# EAGLE board LTC_Balancer1 (EAGLE 5.06)

Size 160 x 100 mm. Coordinates in mm from the lower left corner, seen from the top.
Outline: 0,0 160,0 160,100 0,100 0,0
Copper layers (1*16): Top 0.035mm / dielectric 1.5mm / Bottom 0.035mm
Design rules "default": minimum track width 10mil, minimum drill 24mil, track to track 8mil, track to pad 8mil, pad to pad 8mil, via to via 8mil, smd to smd 8mil, copper to edge 40mil, drill to drill 8mil, minimum pad ring 10mil, minimum via ring 8mil, stop-mask expansion 4mil, vias tented up to drill 0mil, thermal gap 10mil

## Footprints (pad centres in the part's own frame; a part is rotated, then mirrored left to right if it is on the bottom)
2X04 = drill 1.016 octagon: 1 -3.81,-1.27; 2 -3.81,1.27; 3 -1.27,-1.27; 4 -1.27,1.27; 5 1.27,-1.27; 6 1.27,1.27; 7 3.81,-1.27; 8 3.81,1.27
1X04 = drill 1.016 long: 1 -3.81,0; 2 -1.27,0; 3 1.27,0; 4 3.81,0
1X12 = drill 1.016 long: 1 -13.97,0; 2 -11.43,0; 3 -8.89,0; 4 -6.35,0; 5 -3.81,0; 6 -1.27,0; 7 1.27,0; 8 3.81,0; 9 6.35,0; 10 8.89,0; 11 11.43,0; 12 13.97,0
C1206 = smd 1.6 x 1.8: 1 -1.4,0; 2 1.4,0
1X01 = drill 1.016 octagon: 1 0,0
DIL16 = drill 0.813 offset: 1 -8.89,-3.81; 2 -6.35,-3.81; 3 -3.81,-3.81; 4 -1.27,-3.81; 5 1.27,-3.81; 6 3.81,-3.81; 7 6.35,-3.81; 8 8.89,-3.81; 9 8.89,3.81; 10 6.35,3.81; 11 3.81,3.81; 12 1.27,3.81; 13 -1.27,3.81; 14 -3.81,3.81; 15 -6.35,3.81; 16 -8.89,3.81
R1206 = smd 1.6 x 1.803: 1 -1.422,0; 2 1.422,0
R_5W = drill 0.813 octagon: 1 0.46,0; 2 28.08,0
ML10 = drill 0.914 octagon: 1 -5.08,-1.27; 2 -5.08,1.27; 3 -2.54,-1.27; 4 -2.54,1.27; 5 0,-1.27; 6 0,1.27; 7 2.54,-1.27; 8 2.54,1.27; 9 5.08,-1.27; 10 5.08,1.27
SO8 = smd 1.524 x 0.61: 1 1.067,4.445; 2 1.067,3.175; 3 1.067,1.905; 4 1.067,0.635; 5 6.553,0.635; 6 6.553,1.905; 7 6.553,3.175; 8 6.553,4.445
1X03 = drill 1.016 long: 1 -2.54,0; 2 0,0; 3 2.54,0
SSOP48 = smd 0.3 x 1.25: P$1 0,0.5; P$2 0.5,0.5; P$3 1,0.5; P$4 1.5,0.5; P$5 2,0.5; P$6 2.5,0.5; P$7 3,0.5; P$8 3.5,0.5; P$9 4,0.5; P$10 4.5,0.5; P$11 5,0.5; P$12 5.5,0.5; P$13 6,0.5; P$14 6.5,0.5; P$15 7,0.5; P$16 7.5,0.5; P$17 8,0.5; P$18 8.5,0.5; P$19 9,0.5; P$20 9.5,0.5; P$21 10,0.5; P$22 10.5,0.5; P$23 10.5,7.5; P$24 10,7.5; P$25 9.5,7.5; P$26 9,7.5; P$27 8.5,7.5; P$28 8,7.5; P$29 7.5,7.5; P$30 7,7.5; P$31 6.5,7.5; P$32 6,7.5; P$33 5.5,7.5; P$34 5,7.5; P$35 4.5,7.5; P$36 4,7.5; P$37 3.5,7.5; P$38 3,7.5; P$39 2.5,7.5; P$40 2,7.5; P$41 1.5,7.5; P$42 1,7.5; P$43 0.5,7.5; P$44 0,7.5

## Placement (x,y rotation side)
A_SEL  [2X04]  -63.5,-377.19 0 top  (outside the outline)
A_SEL2  [1X04]  -63.5,-384.81 0 top  (outside the outline)
BAT_CON  [1X12]  -53.34,-266.7 0 top  (outside the outline)
C_REF  1u  [C1206]  -66.04,-350.52 0 top  (outside the outline)
C_REG  1u  [C1206]  -66.04,-355.6 0 top  (outside the outline)
CF1  100n  [C1206]  -57.15,-391.16 0 top  (outside the outline)
CF2  100n  [C1206]  -57.15,-407.67 0 top  (outside the outline)
CF3  100n  [C1206]  -66.04,-454.66 0 top  (outside the outline)
CF4  100n  [C1206]  -66.04,-461.01 0 top  (outside the outline)
CF5  100n  [C1206]  -66.04,-467.36 0 top  (outside the outline)
CF6  100n  [C1206]  -66.04,-473.71 0 top  (outside the outline)
CF7  100n  [C1206]  -66.04,-480.06 0 top  (outside the outline)
CF8  100n  [C1206]  -66.04,-486.41 0 top  (outside the outline)
CF9  100n  [C1206]  -66.04,-492.76 0 top  (outside the outline)
CF10  100n  [C1206]  -66.04,-499.11 0 top  (outside the outline)
CF11  100n  [C1206]  -66.04,-505.46 0 top  (outside the outline)
CF12  100n  [C1206]  -66.04,-511.81 0 top  (outside the outline)
JP1  [1X01]  -67.31,-402.59 0 top  (outside the outline)
OK1  ILQ1  [DIL16]  -57.15,-276.86 0 top  (outside the outline)
R2  1k8  [R1206]  -66.04,-288.29 0 top  (outside the outline)
R3  910  [R1206]  -66.04,-294.64 0 top  (outside the outline)
R4  910  [R1206]  -66.04,-300.99 0 top  (outside the outline)
R5  910  [R1206]  -66.04,-307.34 0 top  (outside the outline)
R6  910  [R1206]  -66.04,-313.69 0 top  (outside the outline)
R7  1k8  [R1206]  -66.04,-320.04 0 top  (outside the outline)
R8  1k8  [R1206]  -66.04,-326.39 0 top  (outside the outline)
R9  1k8  [R1206]  -66.04,-332.74 0 top  (outside the outline)
RF1  100  [R1206]  -57.15,-396.24 0 top  (outside the outline)
RF2  100  [R1206]  -57.15,-412.75 0 top  (outside the outline)
RF3  100  [R1206]  -66.04,-518.16 0 top  (outside the outline)
RF4  100  [R1206]  -66.04,-524.51 0 top  (outside the outline)
RF5  100  [R1206]  -66.04,-530.86 0 top  (outside the outline)
RF6  100  [R1206]  -66.04,-537.21 0 top  (outside the outline)
RF7  100  [R1206]  -66.04,-543.56 0 top  (outside the outline)
RF8  100  [R1206]  -66.04,-549.91 0 top  (outside the outline)
RF9  100  [R1206]  -66.04,-556.26 0 top  (outside the outline)
RF10  100  [R1206]  -66.04,-562.61 0 top  (outside the outline)
RF11  100  [R1206]  -66.04,-568.96 0 top  (outside the outline)
RF12  100  [R1206]  -66.04,-575.31 0 top  (outside the outline)
RL1  R_5W  [R_5W]  39.37,25.4 0 top
RL2  R_5W  [R_5W]  13.97,36.83 0 top
RL3  R_5W  [R_5W]  -36.83,-435.61 0 top  (outside the outline)
RL4  R_5W  [R_5W]  -36.83,-422.91 0 top  (outside the outline)
RL6  R_5W  [R_5W]  -36.83,104.14 0 top  (outside the outline)
RL7  R_5W  [R_5W]  -36.83,158.75 0 top  (outside the outline)
RL8  R_5W  [R_5W]  -36.83,146.05 0 top  (outside the outline)
RL9  R_5W  [R_5W]  -36.83,200.66 0 top  (outside the outline)
RL10  R_5W  [R_5W]  -36.83,187.96 0 top  (outside the outline)
RL11  R_5W  [R_5W]  -36.83,242.57 0 top  (outside the outline)
RL12  R_5W  [R_5W]  -36.83,229.87 0 top  (outside the outline)
SV1  [ML10]  -57.15,-219.71 0 top  (outside the outline)
T1  IRF_7104  [SO8]  -10.16,-163.83 0 top  (outside the outline)
T2  IRF_7104  [SO8]  -36.83,-448.31 0 top  (outside the outline)
T3  IRF_7104  [SO8]  -36.83,128.27 0 top  (outside the outline)
T4  IRF_7104  [SO8]  -36.83,170.18 0 top  (outside the outline)
T5  IRF_7104  [SO8]  -36.83,212.09 0 top  (outside the outline)
T6  IRF_7104  [SO8]  -36.83,254 0 top  (outside the outline)
TEMP_CON  [1X03]  -64.77,-369.57 0 top  (outside the outline)
U$1  LTC6802-2  [SSOP48]  19.05,17.78 270 top
U$8  R_5W  [R_5W]  -36.83,116.84 0 top  (outside the outline)

## Library data of the parts
A_SEL A_SEL2 BAT_CON JP1 TEMP_CON = pinhead
C_REF C_REG CF1-CF12 R2-R9 RF1-RF12 = rcl
OK1 = optocoupler
RL1-RL4 RL6-RL12 U$8 = R_Power
SV1 = con-ml
T1-T6 = IRF_7104
U$1 = LTC6802

## Nets
+5V: R7.2 SV1.2
A0: A_SEL.8 U$1.P$37
A1: A_SEL.6 U$1.P$38
A2: A_SEL.4 U$1.P$39
A3: A_SEL.2 U$1.P$40
BK2: BAT_CON.2 CF2.2 RF1.1 RL2.2 T1.3
BK3: BAT_CON.3 CF3.2 RF2.1 RL3.2 T1.1
BK4: BAT_CON.4 CF4.2 RF3.1 RL4.2 T2.3
BK5: BAT_CON.5 CF5.2 RF4.1 T2.1 U$8.2
BK6: BAT_CON.6 CF6.2 RF5.1 RL6.2 T3.3
BK7: BAT_CON.7 CF7.2 RF6.1 RL7.2 T3.1
BK8: BAT_CON.8 CF8.2 RF7.1 RL8.2 T4.3
BK9: BAT_CON.9 CF9.2 RF8.1 RL9.2 T4.1
BK10: BAT_CON.10 CF10.2 RF9.1 RL10.2 T5.3
BK11: BAT_CON.11 CF11.2 RF10.1 RL11.2 T5.1
BK12: BAT_CON.12 CF12.2 RF11.1 RL12.2 T6.3
C1: CF1.1 RF1.2 U$1.P$24
C2: CF2.1 RF2.2 U$1.P$22
C3: CF3.1 RF3.2 U$1.P$20
C4: CF4.1 RF4.2 U$1.P$18
C5: CF5.1 RF5.2 U$1.P$16
C6: CF6.1 RF6.2 U$1.P$14
C7: CF7.1 RF7.2 U$1.P$12
C8: CF8.1 RF8.2 U$1.P$10
C9: CF9.1 RF9.2 U$1.P$8
C10: CF10.1 RF10.2 U$1.P$6
C11: CF11.1 RF11.2 U$1.P$4
C12: CF12.1 RF12.2 U$1.P$2
CS: R3.1 SV1.3
CSBI: OK1.15 R2.1 U$1.P$44
GND: OK1.2 OK1.6 OK1.7 OK1.13 SV1.4 SV1.6 SV1.8 SV1.10
MISO: OK1.14 R7.1 SV1.9
MOSI: R5.1 SV1.1
N$1: OK1.1 R3.2
N$2: TEMP_CON.1 U$1.P$29
N$3: C_REF.1 U$1.P$30
N$4: TEMP_CON.2 U$1.P$28
N$5: RL3.1 T2.5
N$6: RL4.1 T2.7
N$8: RL1.1 T1.5
N$9: RL2.1 T1.7
N$10: RL6.1 T3.7
N$11: RL7.1 T4.5
N$12: RL8.1 T4.7
N$13: RL9.1 T5.5
N$14: RL10.1 T5.7
N$15: RL11.1 T6.5
N$16: RL12.1 T6.7
N$19: OK1.4 R4.2
N$20: OK1.5 R5.2
N$21: OK1.8 R6.2
RL5: T3.5 U$8.1
S1: T1.4 U$1.P$25
S2: T1.2 U$1.P$23
S3: T2.4 U$1.P$21
S4: T2.2 U$1.P$19
S5: T3.4 U$1.P$17
S6: T3.2 U$1.P$15
S7: T4.4 U$1.P$13
S8: T4.2 U$1.P$11
S9: T5.4 U$1.P$9
S10: T5.2 U$1.P$7
S11: T6.4 U$1.P$5
S12: T6.2 U$1.P$3
SCK: R6.1 SV1.7
SCKI: OK1.10 R9.1 U$1.P$41
SDI: OK1.11 R8.1 U$1.P$42
SDO: R4.1 U$1.P$43
V+: JP1.1 RF12.1 T6.1
V-: A_SEL.1 A_SEL.3 A_SEL.5 A_SEL.7 BAT_CON.1 C_REF.2 C_REG.2 CF1.2 OK1.3 OK1.9 OK1.12 OK1.16 TEMP_CON.3 U$1.P$26 U$1.P$27 U$1.P$32
VCC: A_SEL2.1 A_SEL2.2 A_SEL2.3 A_SEL2.4 C_REG.1 R2.2 R8.2 R9.2 U$1.P$31 U$1.P$33

## Tracks (layer width: path | path; a pad name or v marks a point on that pad's centre or on a via)
+5V  (1 unrouted)
A0  (1 unrouted)
A1  (1 unrouted)
A2  (1 unrouted)
A3  (1 unrouted)
BK2  (4 unrouted)
BK3  (4 unrouted)
BK4  (4 unrouted)
BK5  (4 unrouted)
BK6  (4 unrouted)
BK7  (4 unrouted)
BK8  (4 unrouted)
BK9  (4 unrouted)
BK10  (4 unrouted)
BK11  (4 unrouted)
BK12  (4 unrouted)
C1  (2 unrouted)
C2  (2 unrouted)
C3  (2 unrouted)
C4  (2 unrouted)
C5  (2 unrouted)
C6  (2 unrouted)
C7  (2 unrouted)
C8  (2 unrouted)
C9  (2 unrouted)
C10  (2 unrouted)
C11  (2 unrouted)
C12  (2 unrouted)
CS  (1 unrouted)
CSBI  (2 unrouted)
GND  (7 unrouted)
MISO  (2 unrouted)
MOSI  (1 unrouted)
N$1  (1 unrouted)
N$2  (1 unrouted)
N$3  (1 unrouted)
N$4  (1 unrouted)
N$5  (1 unrouted)
N$6  (1 unrouted)
N$8  (1 unrouted)
N$9  (1 unrouted)
N$10  (1 unrouted)
N$11  (1 unrouted)
N$12  (1 unrouted)
N$13  (1 unrouted)
N$14  (1 unrouted)
N$15  (1 unrouted)
N$16  (1 unrouted)
N$19  (1 unrouted)
N$20  (1 unrouted)
N$21  (1 unrouted)
RL5  (1 unrouted)
S1  (1 unrouted)
S2  (1 unrouted)
S3  (1 unrouted)
S4  (1 unrouted)
S5  (1 unrouted)
S6  (1 unrouted)
S7  (1 unrouted)
S8  (1 unrouted)
S9  (1 unrouted)
S10  (1 unrouted)
S11  (1 unrouted)
S12  (1 unrouted)
SCK  (1 unrouted)
SCKI  (2 unrouted)
SDI  (2 unrouted)
SDO  (1 unrouted)
V+  (2 unrouted)
V-  (15 unrouted)
VCC  (9 unrouted)